# EAGLE board PediPart1 (EAGLE 7.3.0)
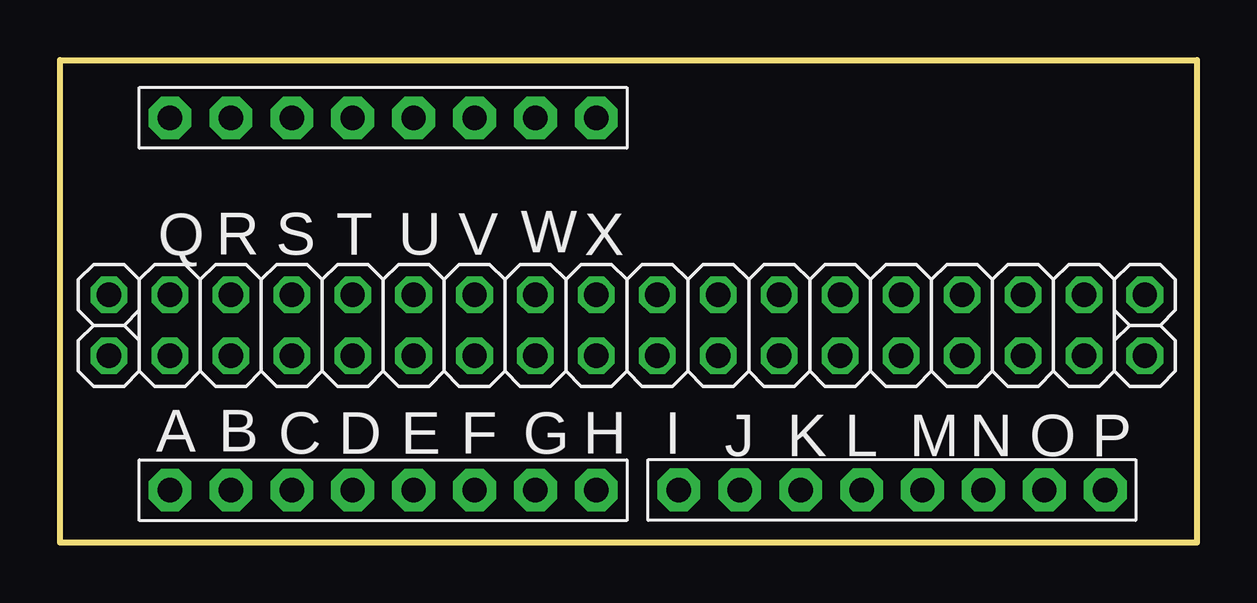
[diagram p0: board, top side]
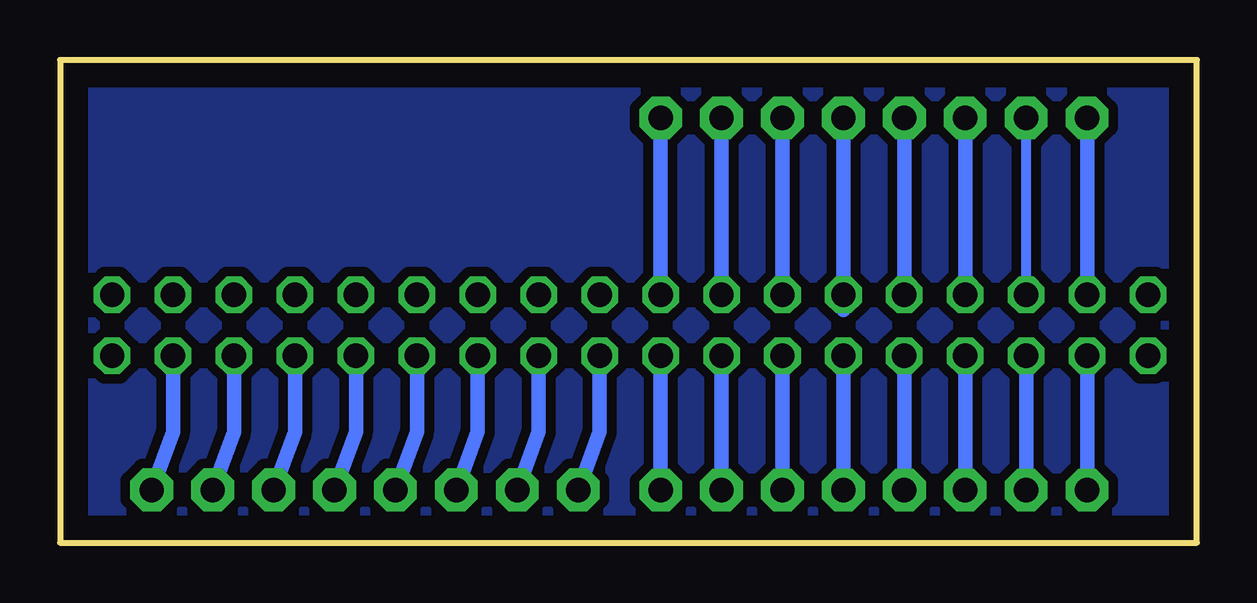
[diagram p1: board, bottom side, seen from below]

Size 47.39 x 20.13 mm. Coordinates in mm from the lower left corner, seen from the top.
Outline: 0,20.13 47.39,20.13 47.39,0 0,0 0,20.13
Copper layers (1*16): Top 0.035mm / dielectric 1.5mm / Bottom 0.035mm
Design rules "default *": minimum track width 8mil, minimum drill 16mil, track to track 8mil, track to pad 8mil, pad to pad 8mil, via to via 10mil, smd to smd 8mil, copper to edge 40mil, drill to drill 12mil, minimum pad ring 10mil, minimum via ring 10mil, stop-mask expansion 4mil, vias tented up to drill 0mil, thermal gap 10mil
Net classes: 0 default: width 0.203 mm, drill 0.406 mm, clearance 0.406 mm; 1 power: width 0.61 mm, drill 0.711 mm, clearance 0.203 mm; 2 gnd: width 0.305 mm, drill 0.711 mm, clearance 0.406 mm; 3 usbvcc: width 0.508 mm, drill 0.711 mm, clearance 0.203 mm

## Footprints (pad centres in the part's own frame; a part is rotated, then mirrored left to right if it is on the bottom)
1X08-BIG = drill 1.016 pad 1.778 octagon: 1 -8.89,0; 2 -6.35,0; 3 -3.81,0; 4 -1.27,0; 5 1.27,0; 6 3.81,0; 7 6.35,0; 8 8.89,0
2X08 = drill 1.016 octagon: 1 -8.89,-1.27; 2 -8.89,1.27; 3 -6.35,-1.27; 4 -6.35,1.27; 5 -3.81,-1.27; 6 -3.81,1.27; 7 -1.27,-1.27; 8 -1.27,1.27; 9 1.27,-1.27; 10 1.27,1.27; 11 3.81,-1.27; 12 3.81,1.27; 13 6.35,-1.27; 14 6.35,1.27; 15 8.89,-1.27; 16 8.89,1.27
1X01 = drill 1.016 octagon: 1 0,0

## Placement (x,y rotation side)
E$1  [1X08-BIG]  13.47,2.19 0 top
E$2  [1X08-BIG]  34.68,2.2 0 top
E$3  [1X08-BIG]  13.47,17.71 0 top
JP1  [2X08]  13.47,9.06 180 top
JP2  [2X08]  33.79,9.06 180 top
JP3  [1X01]  2.04,7.79 90 top
JP4  [1X01]  2.04,10.34 90 top
JP5  [1X01]  45.22,7.79 90 top
JP6  [1X01]  45.22,10.34 90 top

## Library data of the parts
E$1-E$3 = adafruit
JP1-JP6 = pinhead

## Nets
PB0: JP2.1
PB2: JP2.3
PC2: E$3.7 JP1.3
PC4: E$3.6 JP1.5
PG0: JP2.13
PG2: JP2.15
PL0: JP2.5
PL2: JP2.7
PL4: JP2.9
PL6: JP2.11
S$1: E$3.2 JP1.13
S$4: E$3.1 JP1.15
S$6: E$3.3 JP1.11
S$7: E$3.4 JP1.9
S$8: E$3.5
S$9: E$3.8 JP1.1
S$10: E$1.1 JP1.16
S$11: E$1.2 JP1.14
S$12: E$1.3 JP1.12
S$13: E$1.4 JP1.10
S$14: E$1.5 JP1.8
S$15: E$1.6 JP1.6
S$16: E$1.7 JP1.4
S$17: E$1.8 JP1.2
S$18: E$2.1 JP2.16
S$19: E$2.2 JP2.14
S$20: E$2.3 JP2.12
S$21: E$2.4 JP2.10
S$22: E$2.5 JP2.8
S$23: E$2.6 JP2.6
S$24: E$2.7 JP2.4
S$25: E$2.8 JP2.2

## Tracks (layer width: path | path; a pad name or v marks a point on that pad's centre or on a via)
GND
  pour Bottom: 47.7,20.5 47.7,-0.3 -0.3,-0.3 0.1,20.5
PC2
  Bottom 0.61: E$3.7 JP1.3
PC4
  Bottom 0.61: E$3.6 JP1.5
S$1
  Bottom 0.406: JP1.13 E$3.2
S$4
  Bottom 0.61: E$3.1 JP1.15
S$6
  Bottom 0.61: E$3.3 JP1.11
S$7
  Bottom 0.61: E$3.4 JP1.9
S$8
  Bottom 0.61: E$3.5 14.74,9.7
S$9
  Bottom 0.61: JP1.1 E$3.8
S$10
  Bottom 0.61: JP1.16 E$1.1
S$11
  Bottom 0.61: JP1.14 E$1.2
S$12
  Bottom 0.61: E$1.3 JP1.12
S$13
  Bottom 0.61: E$1.4 JP1.10
S$14
  Bottom 0.61: JP1.8 E$1.5
S$15
  Bottom 0.61: JP1.6 E$1.6
S$16
  Bottom 0.61: E$1.7 JP1.4
S$17
  Bottom 0.61: JP1.2 E$1.8
S$18
  Bottom 0.61: JP2.16 24.9,4.62 E$2.1
S$19
  Bottom 0.61: JP2.14 27.44,4.62 E$2.2
S$20
  Bottom 0.61: JP2.12 29.98,4.62 E$2.3
S$21
  Bottom 0.61: JP2.10 32.52,4.62 E$2.4
S$22
  Bottom 0.61: JP2.8 35.06,4.62 E$2.5
S$23
  Bottom 0.61: JP2.6 37.6,4.62 E$2.6
S$24
  Bottom 0.61: JP2.4 40.14,4.62 E$2.7
S$25
  Bottom 0.61: JP2.2 42.68,4.62 E$2.8

## Text on the board
tNames: Q | R | S | T | U | V | W | X | A | B | C | D | E | F | G | H | I | J | K | L | M | N | O | P